# Altium PCB MRF49XAmboard.PcbDoc
Units mm, origin at the board's own origin, x right, y up, seen from the top; angles counter-clockwise.
Board outline 20.81 x 30 mm, 2 copper layers (Top Layer, Bottom Layer); 14 components, 17 nets, 47 pads, 29 vias.
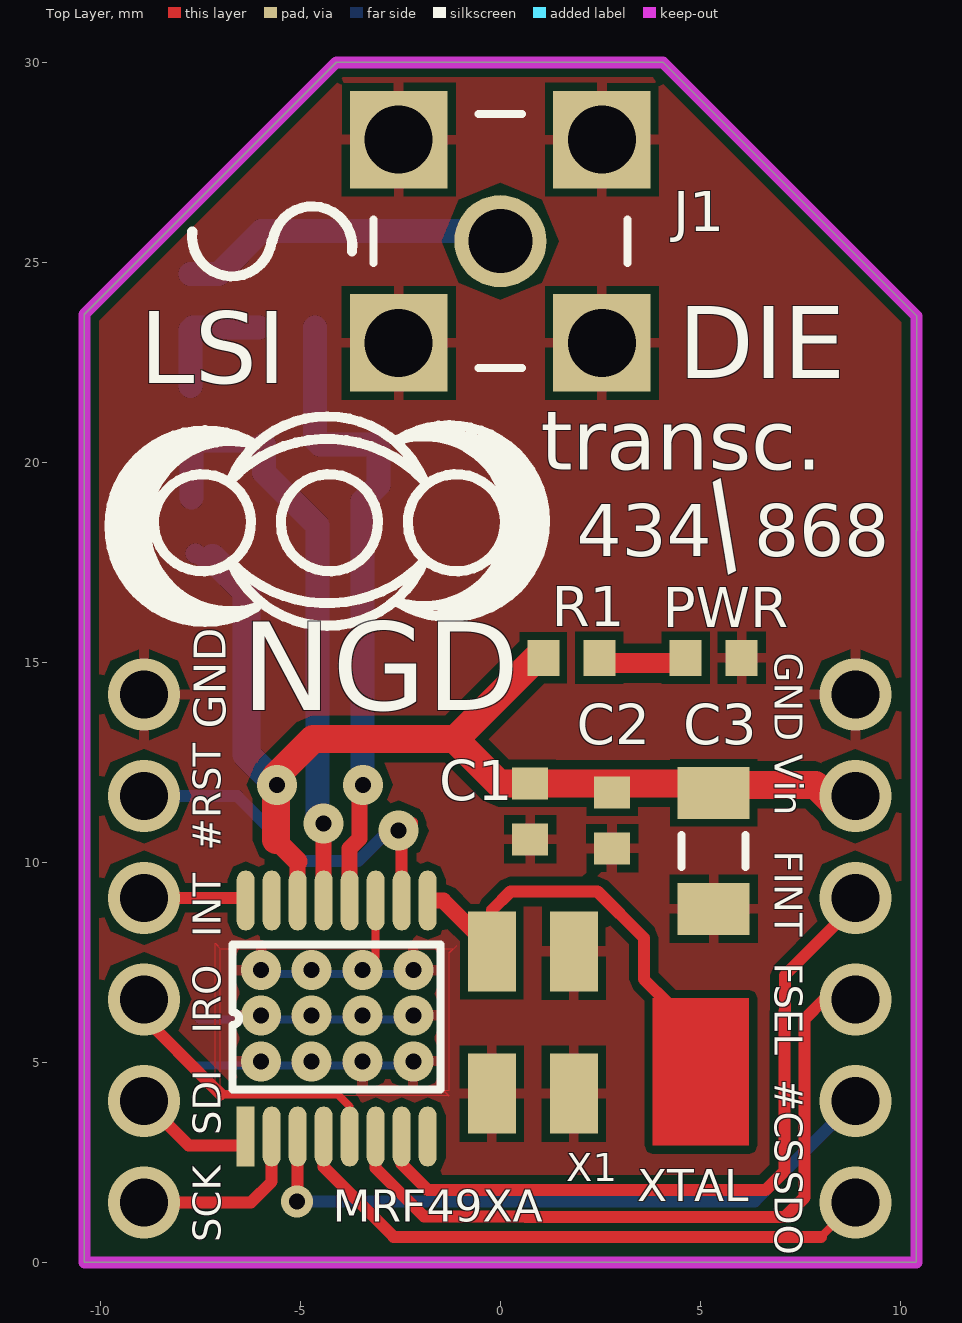
[diagram p0: Top Layer view]
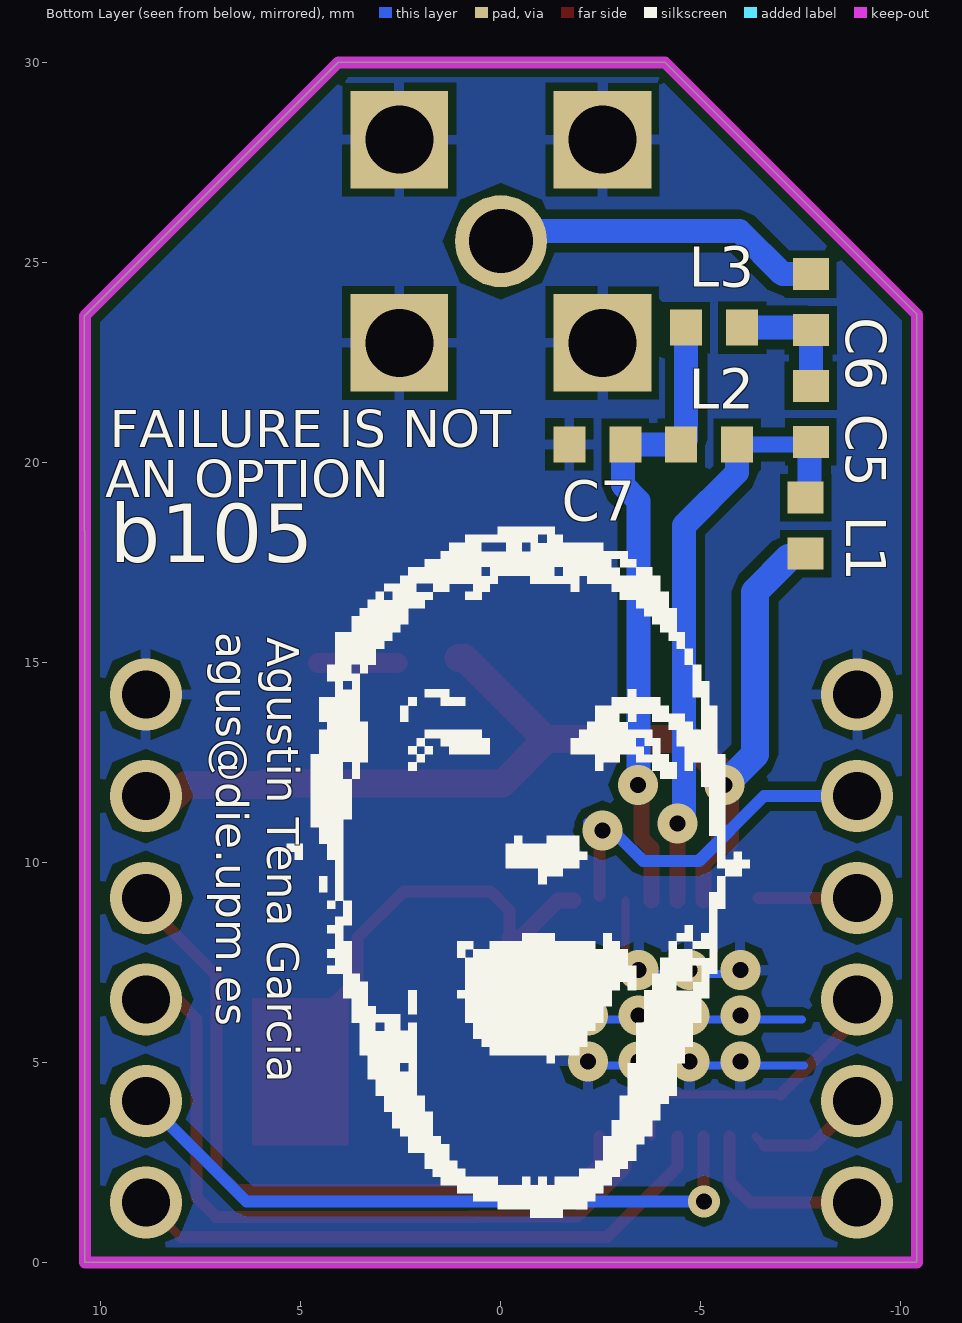
[diagram p1: Bottom Layer view, seen from below]
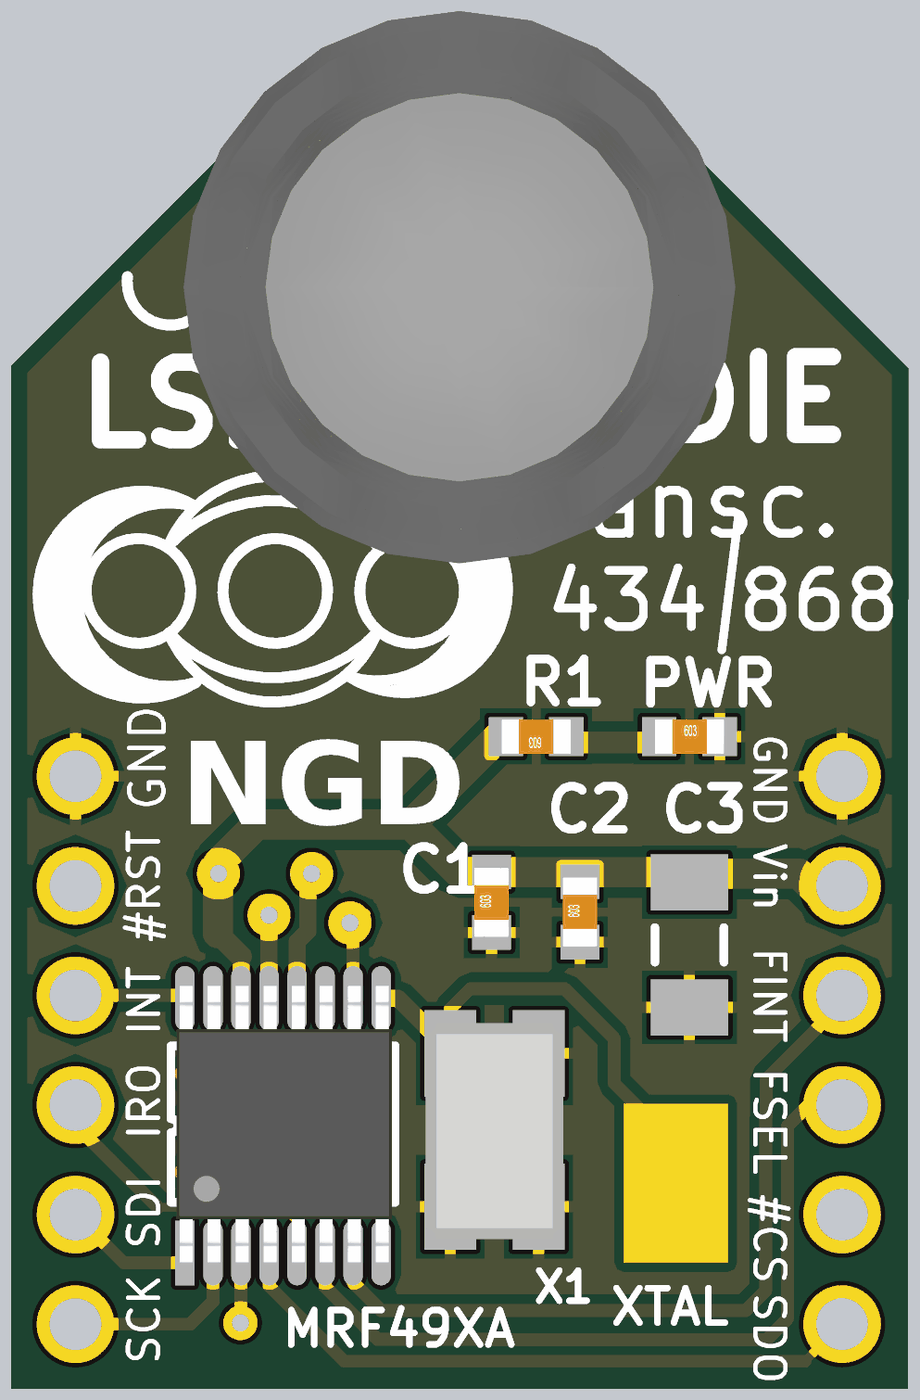
[diagram p2: 3D render of the assembled board from above, using the file's embedded part models]
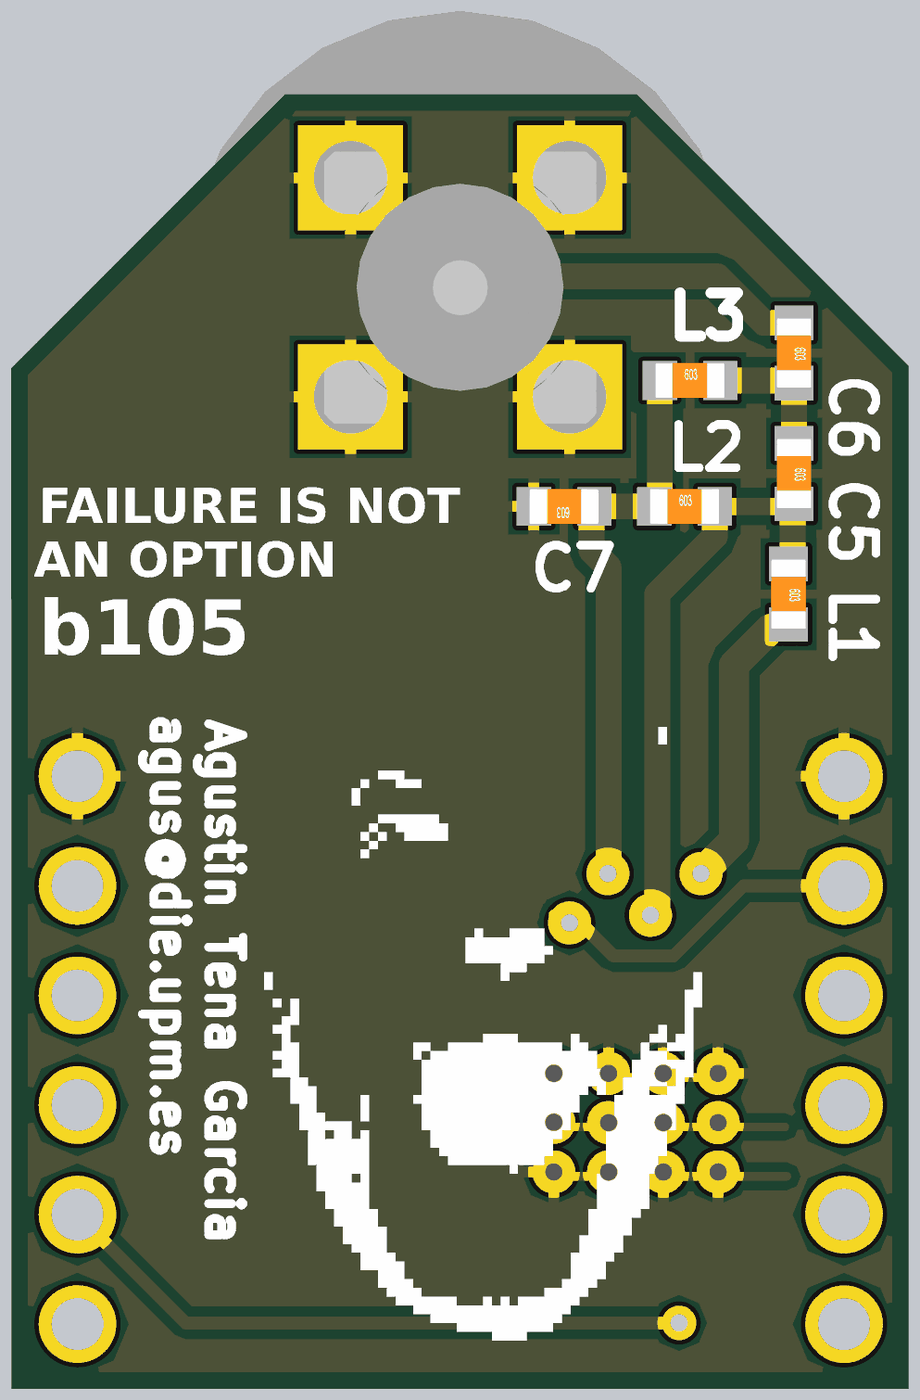
[diagram p3: 3D render of the assembled board from below, using the file's embedded part models]

## Layer stack, top to bottom
Top Layer: signal copper 0.0356
Dielectric: dielectric 0.32, FR-4, Dk 4.8
Bottom Layer: signal copper 0.0356

## Board outline
-10.4,0 -10.4,23.7 -4.1,30 4.064,30 10.414,23.65 10.414,18.288 10.4,18.302 10.4,0

## Design rules (kind name [scope] priority, off if disabled: settings)
Clearance [All] p1: gap=0.2
Height [All] p1: minheight=0 maxheight=100 prefheight=12.7
HoleSize [All] p1: absolutevalues=TRUE maxlimit=1 minlimit=0.4 maxpercent=80.000 minpercent=20.000
MinimumAnnularRing [All] p1: minimumring=0.2
PolygonConnect [All] p1: connectstyle=Relief reliefconductorwidth=0.254 reliefentries=4 polygonreliefangle="90 Angle"
RoutingVias [All] p1: holewidth=0.4 width=1 viastyle="Through Hole" minholewidth=0.2 minwidth=0.8 maxholewidth=1 maxwidth=1.4
SilkscreenOverComponentPads [All] p1: minsilkscreentomaskgap=0.254
SolderMaskExpansion [All] p1: expansion=0.102
Width Width_VCC [InNet('VCC')] p1: maxlimit=1 minlimit=0.3 preferedwidth=0.4 minimp=50.000000 maximp=50.000000 favimp=50.000000
Width [All] p2: maxlimit=1 minlimit=0.2 preferedwidth=0.2 minimp=50.000000 maximp=50.000000 favimp=50.000000
25 further rules are at their usual default settings.

## Components (designator, comment, footprint, x,y, rotation, side; value= is the part's Value field where it differs from the comment)
C1 "Cap" 1608[0603]#1 0.746,11.273 r90 top
C2 "Cap" 1608[0603]#1 2.794,11.049 r90 top
C3 "Cap" CAPC3216N 5.334,10.287 r90 top
C5 "Cap" 1608[0603]#1 -7.747,21.209 r270 bottom
C6 "Cap" 1608[0603]#1 -7.747,24.003 r270 bottom
C7 "Cap" 1608[0603]#1 -2.413,20.447 r180 bottom
J1 "SMA 50OHM PCB launcher" "SMA PCB LAUNCHER" 0,25.527 r90 top
L1 "L" 1608[0603]#1 -7.62,18.415 r270 bottom
L2 "L" 1608[0603]#2 -5.207,20.447 r180 top
L3 "L" 1608[0603]#1 -5.334,23.368 r180 bottom
MRF49XA "MRF49XA" MRF49XA -6.366,3.145 r90 top
PWR "LED_SMD_Hg" 1608[0603]#1 5.334,15.113 r0 top (schematic designator LED1)
R1 "Res1" 1608[0603]#1 1.778,15.113 r180 top
X1 "XTAL" "XTC CRYSTAL" 0.762,5.969 r0 top

## Footprints (in the part's own frame and the unit in brackets; to place one, negate y for a bottom-side part, rotate by r counter-clockwise, add the part's x,y. Pads: shape width x height; smd on the part's side, far side on the other; paste and mask are expansions set on the pad)
1608[0603]#1 [mm] "Chip Capacitor, Body 1.6x0.8mm, IPC High Density"
  rect 0.8x0.9 smd: 1(-0.7,0) 2(0.7,0)
  body extent -0.8,-0.4 0.8,0.4, height 0.3
1608[0603]#2 [mm] "Chip Capacitor, Body 1.6x0.8mm, IPC High Density"
  rect 0.8x0.9 smd far side: 1(-0.7,0) 2(0.7,0)
  body extent -0.8,-0.4 0.8,0.4, height 0.3
CAPC3216N [mm] "Chip Capacitor, Body 3.2x1.6mm, IPC Medium Density"
  rect 1.3x1.8 smd: 1(-1.45,0) 2(1.45,0)
  silkscreen extent -0.4,-0.8 0.4,0.8, body extent -1.7,-0.9 1.7,0.9, height 1.35
MRF49XA [mm]
  rect 1.5x0.45 smd: 1(0,0)
  oval 1.5x0.45 smd: 2(0,-0.65) 3(0,-1.3) 4(0,-1.95) 5(0,-2.6) 6(0,-3.25) 7(0,-3.9) 8(0,-4.55) 9(5.9,-4.55) 10(5.9,-3.9) 11(5.9,-3.25) 12(5.9,-2.6) 13(5.9,-1.95) 14(5.9,-1.3) 15(5.9,-0.65) 16(5.9,0)
  silkscreen extent 1.17,-4.88 4.8,0.33, body extent -0.21,-4.8 6.19,0.2, height 1.1
"SMA PCB LAUNCHER" [mm]
  round 2.3 hole 1.6: 1(0,0)
  rect 2.44x2.44 hole 1.7: 2(-2.54,-2.54) 3(2.54,-2.54) 4(2.54,2.54) 5(-2.54,2.54)
  silkscreen extent -3.17,-3.17 3.17,3.17, body extent -6.4,-6.4 6.4,6.4, height 55.88
"XTC CRYSTAL" [mm] "10 MHz 10 ppm 10pF"
  rect 1.2x2 smd: 1(-0.975,1.8) 2(-0.975,-1.75) 3(1.075,-1.75) 4(1.075,1.8)
  body extent -1.55,-2.5 1.65,2.5, height 0.9

## Part data
C1 C2 C3 C5 C6 C7: "Capacitor"
J1: "SMA RF Coaxial PCB Connector, SM, Vertical Mount Socket, 50 Ohm Impedance"
L1 L2 L3: "Inductor"
MRF49XA: "Sub-GHz RF transceiver supporting the 433/868/915MHz ISM frequency band"
PWR: "Typical BLUE SiC LED"
R1: "Resistor"
X1: "Crystal Oscillator"

## Via types
v1: diameter 1, hole 0.4, Top Layer to Bottom Layer, 16 vias
v2: diameter 1.8, hole 1.2, Top Layer to Bottom Layer, 12 vias
v3: diameter 0.8, hole 0.4, Top Layer to Bottom Layer, 1 vias

## Nets (pads, with @x,y where several pads share a name; then routed paths per layer and width w, separated by ;. In a path a pad name is that pad's centre, name@x,y a point inside that pad or via, vN(x,y) a via of type N, cw(c..) or ccw(c..) an arc to the next point about the centre after c; other vN are vias at no path point)
CS: MRF49XA.3 | length 16.2
  Top Layer w0.3: v3@-5.066,1.524 MRF49XA.3
  Bottom Layer w0.3: v3@-4.699,1.524 6.364,1.524 v2(8.874,4.034)
  other v3: -5.08,1.524
FINT: MRF49XA.7 | length 18.3
  Top Layer w0.3: MRF49XA.7 -2.466,2.457 -1.818,1.809 6.635,1.809 7.104,2.278 7.104,6.287 7.112,6.295 7.112,7.173 8.874,8.935 v2(8.874,9.114)
FSEL: MRF49XA.6 | length 18.3
  Top Layer w0.3: MRF49XA.6 -3.116,2.354 -1.905,1.143 0.783,1.143 ; 0.635,1.135 7.118,1.135 7.604,1.621 7.604,6.08 8.098,6.574 v2(8.874,6.574)
GND: C1.1 C2.1 C3.1 C7.1 J1.2 J1.3 J1.4 J1.5 MRF49XA.11 PWR.2 X1.2 X1.3 X1.4 | length 17.1
  Top Layer w0.2: v2@-8.906,14.132 v2(-8.906,14.194) v2@-8.287,14.194 ; v1(-3.445,7.309) -3.116,7.638 MRF49XA.11 ; v1@-2.184,6.066 v1@-2.175,6.075
  Bottom Layer w0.2: -7.577,4.923 v1@-2.175,4.923 ; -7.53,6.066 v1@-2.184,6.066 ; v1@-5.985,7.209 v1@-2.176,7.209
  other v1: -5.985,5.023 -4.715,5.023 -3.445,5.023 -2.175,5.023 -5.985,6.166 -4.715,6.166 -3.445,6.166 -2.175,6.175 -5.985,7.309 -4.715,7.309 -2.175,7.309
  other v2: 8.874,14.194
INT: MRF49XA.16 | length 2.5
  Top Layer w0.3: v2(-8.906,9.114) MRF49XA.16@-6.435,9.114
IRQ: MRF49XA.5 | length 7.4
  Top Layer w0.2: -6.994,4.2 -4.073,4.2 -3.766,3.893 MRF49XA.5
  Top Layer w0.3: v2@-9.156,6.362 -6.994,4.2 ; v2@-8.906,6.366 v2(-8.906,6.574)
NetC5_1: C5.1 C6.2 L3.2 | length 3.1
  Bottom Layer w0.4: C6.2 C6.2@-7.682,23.368
  Bottom Layer w0.6: C5.1 C6.2 ; C6.2@-7.682,23.368 L3.2
NetC6_1: C6.1 J1.1 | length 8.3
  Bottom Layer w0.4: J1.1@-0.254,25.781 J1.1
  Bottom Layer w0.6: C6.1 -7.047,24.703 -5.969,25.781 J1.1@-0.254,25.781
NetLED1_1: PWR.1 R1.1 | length 2
  Top Layer w0.5: R1.1@2.589,14.979 PWR.1@4.572,14.979
RESET: MRF49XA.10 | length 10.6
  Top Layer w0.2: v1(-2.54,10.795) -2.159,10.795 -2.159,11.003 v1@-2.175,11.019
  Top Layer w0.3: MRF49XA.10@-2.468,9.17 v1@-2.468,10.795
  Bottom Layer w0.2: v1@-2.921,10.668 -2.494,10.668 -2.159,11.003 -2.159,10.795 v1(-2.54,10.795)
  Bottom Layer w0.3: v2(-8.906,11.654) -6.574,11.654 -4.953,10.033 -3.556,10.033 v1@-2.921,10.668
RF_NEG: C5.2 L1.1 L2.2 MRF49XA.13 | length 15
  Top Layer w0.4: MRF49XA.13 v1(-4.416,10.974)
  Bottom Layer w0.4: C5.2 -7.685,20.447 L2.2
  Bottom Layer w0.6: L1.1@-7.717,19.115 C5.2@-7.717,20.239 ; L2.2 -5.907,19.75 -4.572,18.415 -4.572,11.13 v1(-4.416,10.974)
RF_POS: C7.2 L2.1 L3.1 MRF49XA.12 | length 15.7
  Top Layer w0.4: MRF49XA.12 -3.766,10.351 -3.516,10.601 v1@-3.516,11.74
  Bottom Layer w0.4: C7.2 C7.2@-3.048,20.382
  Bottom Layer w0.6: L3.1 -4.634,20.574 L2.1 C7.2 ; v1@-3.445,12.081 -3.445,19.034 -3.048,19.431 C7.2@-3.048,20.382
  other v1: -3.429,11.938
SCK: MRF49XA.2 | length 4.5
  Top Layer w0.3: v2(-8.906,1.494) -6.239,1.494 -5.716,2.017 MRF49XA.2
SDI: MRF49XA.1 | length 3.1
  Top Layer w0.2: MRF49XA.1@-6.59,2.921 MRF49XA.1
  Top Layer w0.3: v2(-8.904,4.034) -7.791,2.921 MRF49XA.1@-6.59,2.921
SDO: MRF49XA.4 | length 15.1
  Top Layer w0.2: 8.013,0.635 v2(8.874,1.496)
  Top Layer w0.3: MRF49XA.4 -4.416,2.384 -2.667,0.635 8.013,0.635
VCC: C1.2 C2.2 C3.2 L1.2 MRF49XA.14 R1.2 | length 29.3
  Top Layer w0.4: MRF49XA.14 -5.066,10.019
  Top Layer w0.5: -5.604,10.557 -5.066,10.019
  Top Layer w0.7: -5.604,10.557 v1@-5.604,12.162 ; -5.604,10.922 v1@-5.604,12.162 ; -1.124,13.081 -4.685,13.081 v1@-5.604,12.162 ; R1.2@1.062,15.113 0.908,15.113 -1.134,13.072 -0.035,11.973 C1.2 C3.2@5.941,11.973 ; C3.2@5.842,11.938 7.874,11.938 v2@8.382,11.43
  Bottom Layer w0.5: L1.2@-7.412,17.607 L1.2@-7.193,17.607
  Bottom Layer w0.7: L1.2@-7.193,17.607 -6.35,16.764 -6.35,12.7 v1(-5.588,11.938)
  other v2: 8.874,11.654
XTAL: MRF49XA.9 X1.1 | length 9.4
  Top Layer w0.3: X1.1 -0.213,8.12 -0.213,8.804 0.254,9.271 2.43,9.271 3.587,8.114 3.587,7.081 4.191,6.477
  Top Layer w0.4: MRF49XA.9 -1.425,9.045 -0.5,8.12 X1.1@-0.213,8.12
pads on no net: MRF49XA.8 MRF49XA.15

## Polygon pours and split planes (outlines as drawn)
GND on Top Layer "GND" (solid, remove dead copper, pour order 15): -14.732,34.163 -14.732,-0.127 -13.208,-1.651 -12.7,-2.159 17.78,-2.159 17.78,32.766 18.542,33.528
GND on Top Layer "GND" (solid, pour order 10): -7.128,7.971 -7.001,7.844 -1.413,7.844 -1.413,4.288 -1.286,4.161 -7.128,4.161 -7.128,7.971
GND on Top Layer "GND" (solid, remove dead copper, pour order 7): -7.001,7.844 -1.167,7.844 -1.107,7.904 -1.286,7.725 -1.286,4.288 -6.874,4.288 -7.001,4.415 -7.001,7.844
GND on Bottom Layer "GND" (solid, remove dead copper, pour order 13): -13.081,31.877 -13.208,31.75 -13.208,-1.397 14.224,-1.397 14.986,-2.159 15.24,-1.905 15.24,32.258

## Keep-outs
Keep-Out Layer:
  lines w0.3: -10.4,0 -10.4,23.7 -4.1,30 4.064,30 10.4,23.664 10.4,0 -10.4,0

## Other copper
Top Layer:
  region net XTAL: 3.81,6.604 3.81,2.921 6.223,2.921 6.223,6.604

## Silkscreen, mask and mechanical layers (free items; w line width, h text height)
Top Overlay:
  region: -2.551,20.436 cw(c-1.281,18.404) -2.551,16.372 ccw(c-1.916,18.404)
  region: -6.107,16.372 cw(c-7.377,18.404) -6.107,20.436 ccw(c-6.742,18.404)
  lines w0.254: -7.7,25.771 ccw(c-6.708,25.649) -5.715,25.527 ; -6.741,19.551 cw(c-4.329,18.531) -1.916,19.547 ccw(c-4.329,17.261) -6.739,19.55 ; -6.234,18.559 ccw(c-7.447,18.489) -6.233,18.531 ; -5.692,25.522 cw(c-4.699,25.4) -3.706,25.278 ; -3.06,18.559 ccw(c-4.273,18.489) -3.059,18.531 ; -1.92,17.511 cw(c-4.329,19.801) -6.742,17.515 ccw(c-4.329,18.531) -1.918,17.511 ; 0.114,18.559 ccw(c-1.098,18.489) 0.116,18.531 ; -6.107,16.372 cw(c-7.377,18.404) -6.107,20.436 ccw(c-6.742,18.404) -6.107,16.372 ; -2.551,16.499 ccw(c-1.281,18.531) -2.551,20.563 cw(c-1.916,18.531) -2.551,16.499
  text "DIE" at 4.445,22.098 h1.8
  text "LSI" at -9.017,21.971 h1.8
  text "transc." at 1.016,19.812 h1.5
  text "434" at 1.905,17.653 h1.3
  text "868" at 6.35,17.653 h1.3
  text "/" at 5.588,17.399 h2 r26.57
  text "GND" at 6.858,15.24 h0.7 r270
  text "GND" at -6.858,13.335 h0.8 r90
  text "NGD" at -6.477,13.081 h3.8
  text "Vin" at 6.858,12.7 h0.7 r270
  text "#RST" at -6.985,10.287 h0.7 r90
  text "FINT" at 6.858,10.287 h0.7 r270
  text "INT" at -6.985,8.128 h0.7 r90
  text "FSEL" at 6.858,7.493 h0.7 r270
  text "IRO" at -6.985,5.715 h0.7 r90
  text "#CS" at 6.858,4.572 h0.7 r270
  text "SDI" at -6.985,3.175 h0.7 r90
  text "SDO" at 6.858,2.286 h0.7 r270
  text "XTAL" at 3.429,1.524 h0.8
  text "SCK" at -6.985,0.508 h0.7 r90
Bottom Overlay:
  drawing of 13 lines, arcs and shapes, not listed
  text "FAILURE IS NOT" at 9.779,20.066 h1.6
  text "AN OPTION" at 9.893,18.817 h1.6
  text "b105" at 9.779,17.018 h2.5
  text "agus@die.upm.es" at 7.112,15.748 h0.8 r90
  text "Agustin Tena Garcia" at 5.842,15.621 h0.8 r90
Top Solder:
  region: 3.81,6.604 3.81,2.921 6.223,2.921 6.223,6.604